# EAGLE board CommBeaconv1_18_2_12 (EAGLE 5.10)
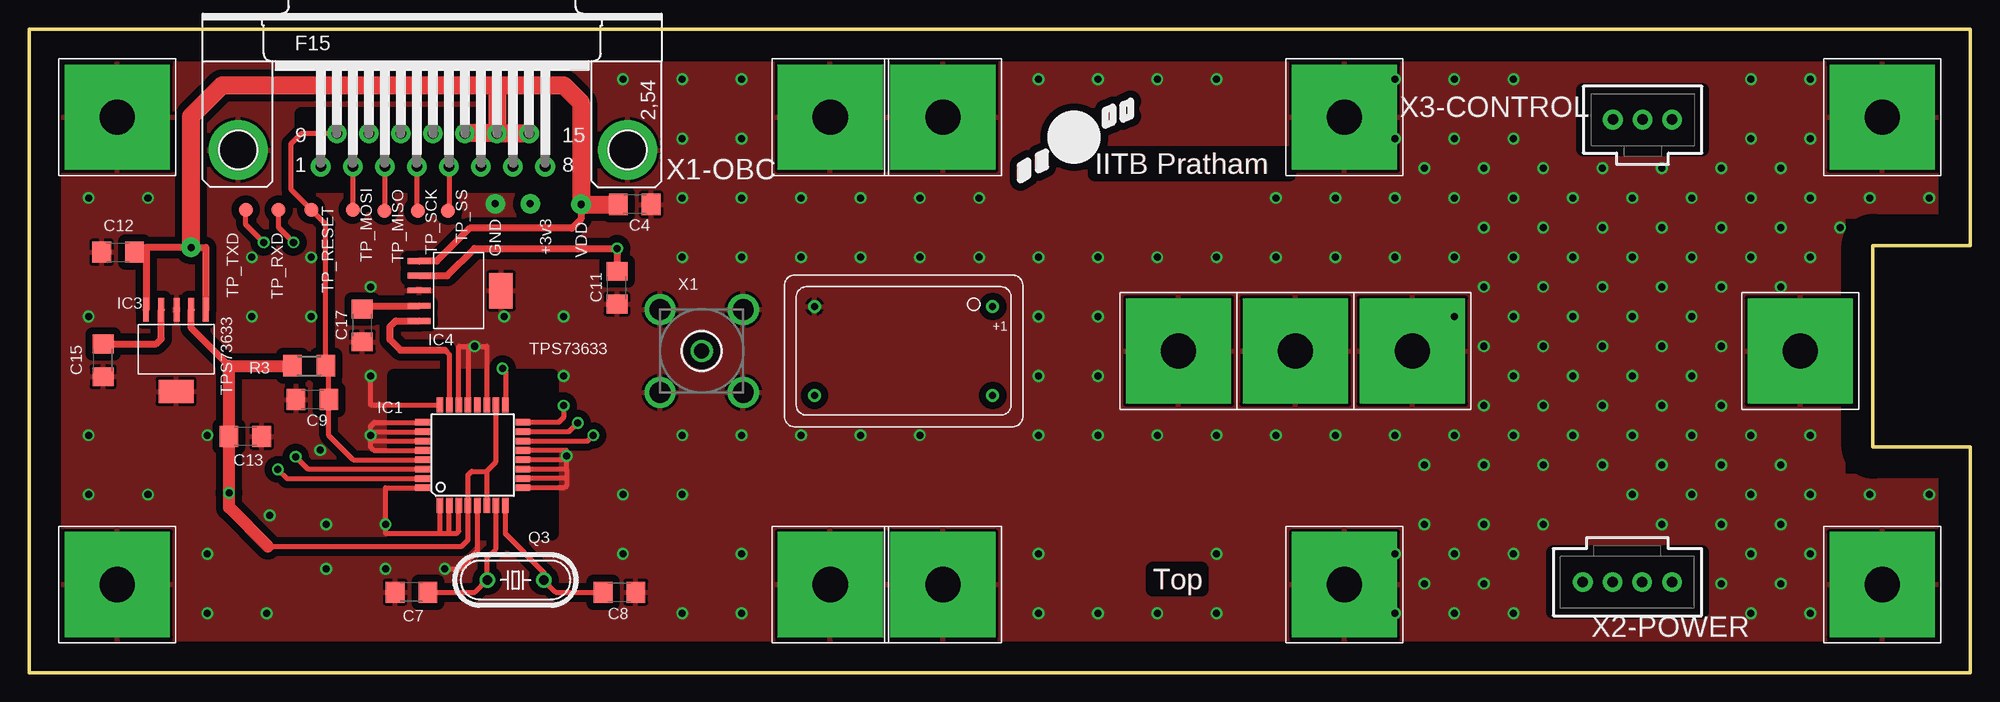
[diagram p0: board, top side]
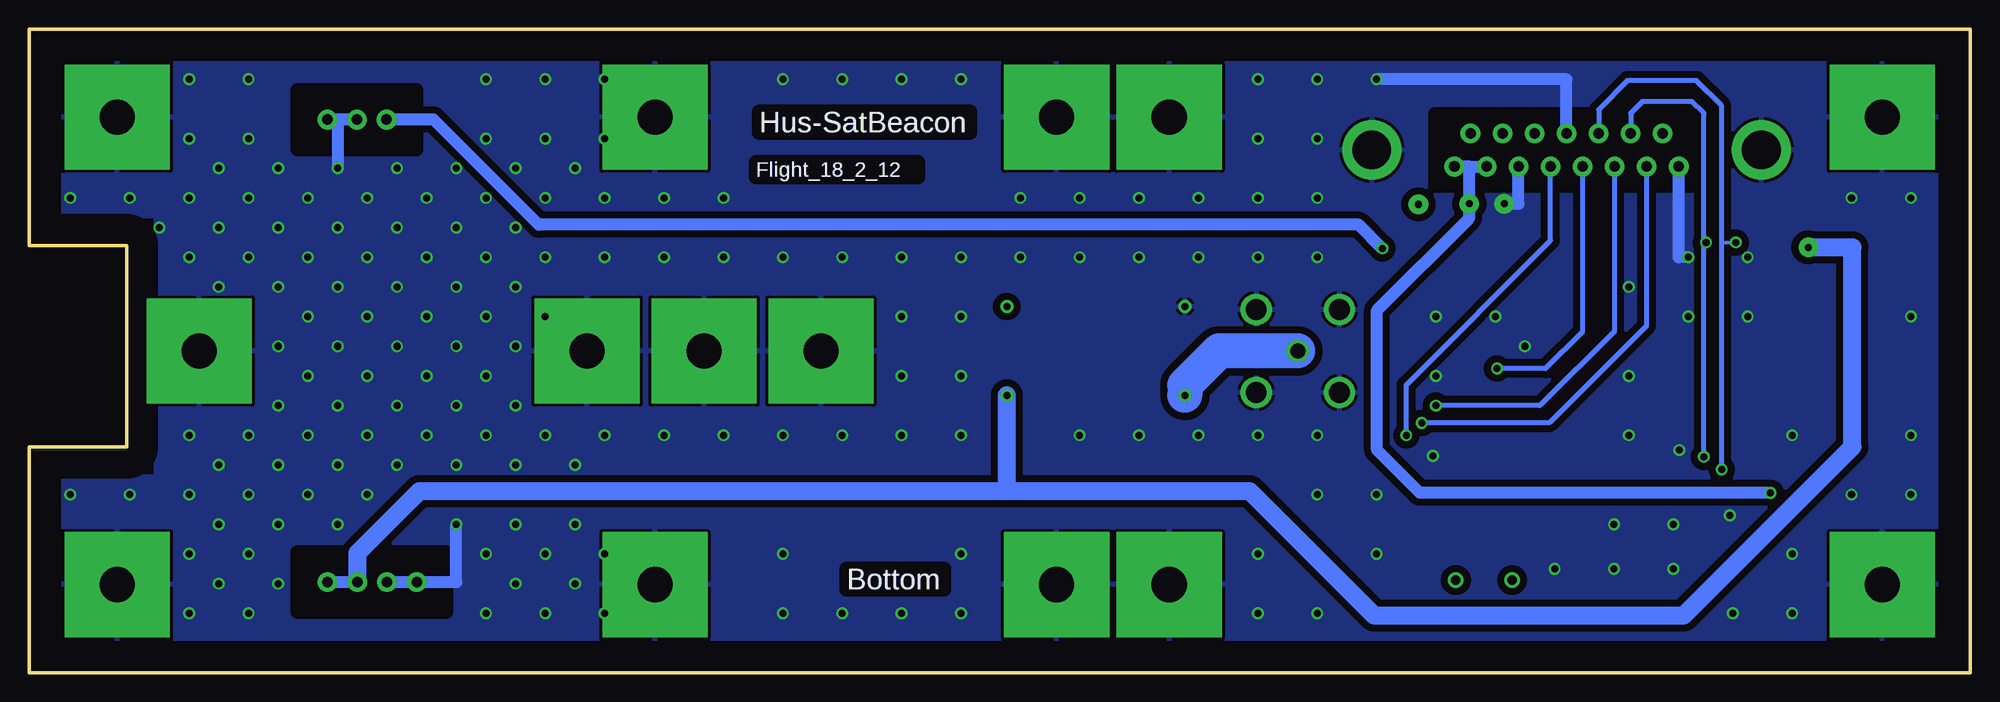
[diagram p1: board, bottom side, seen from below]

Size 166.08 x 55.08 mm. Coordinates in mm from the lower left corner, seen from the top.
Outline: 0,0 0,55.08 166.08,55.08 166.08,36.56 157.75,36.56 157.75,19.32 166.08,19.32 166.08,0 0,0
Copper layers (1*16): Top 0.07mm / dielectric 1.5mm / Bottom 0.07mm
Design rules "satellite": minimum track width 10mil, minimum drill 20mil, track to track 6mil, track to pad 6mil, pad to pad 6mil, via to via 6mil, smd to smd 6mil, copper to edge 100mil, drill to drill 8mil, minimum pad ring 10mil, minimum via ring 8mil, stop-mask expansion 4mil, vias tented up to drill 0mil, thermal gap 10mil
Net classes: 1 Power: width 0.254 mm, clearance 0.508 mm to class 0, clearance 0.508 mm
tRestrict: area 31.2,11.9 to 44.7,25.4

## Footprints (pad centres in the part's own frame; a part is rotated, then mirrored left to right if it is on the bottom)
C1206 = smd 1.6 x 1.8: 1 -1.4,0; 2 1.4,0
TQFP32-08 = smd 1.27 x 0.559: 1 -4.293,2.8; 2 -4.293,2; 3 -4.293,1.2; 4 -4.293,0.4; 5 -4.293,-0.4; 6 -4.293,-1.2; 7 -4.293,-2; 8 -4.293,-2.8; 17 4.293,-2.8; 18 4.293,-2; 19 4.293,-1.2; 20 4.293,-0.4; 21 4.293,0.4; 22 4.293,1.2; 23 4.293,2; 24 4.293,2.8 | smd 0.559 x 1.27: 9 -2.8,-4.293; 10 -2,-4.293; 11 -1.2,-4.293; 12 -0.4,-4.293; 13 0.4,-4.293; 14 1.2,-4.293; 15 2,-4.293; 16 2.8,-4.293; 25 2.8,4.293; 26 2,4.293; 27 1.2,4.293; 28 0.4,4.293; 29 -0.4,4.293; 30 -1.2,4.293; 31 -2,4.293; 32 -2.8,4.293
TXCO = drill 0.6 round: 1 -7.62,-3.81; 7 7.62,-3.81; 8 7.62,3.81; 14 -7.62,3.81
SOT-223-5 = smd 0.5 x 2: 1 -2.54,-2.75; 2 -1.29,-2.75; 3 -0.04,-2.75; 4 1.29,-2.75; 5 2.58,-2.75 | smd 3 x 2: 6 0,4.25
HC49/S = drill 0.813 round: 1 -2.413,0; 2 2.413,0
R1206 = smd 1.6 x 1.803: 1 -1.422,0; 2 1.422,0
TP12R = smd 1.2 x 1.2: TP 0,0
MOUNT_10MM = drill 3 pad 9 square: P$1 0,0
SMA-V = drill 1.27 round: 1 0,0 | drill 1.778 round: 2 -3.556,3.556; 3 3.556,3.556; 4 3.556,-3.556; 5 -3.556,-3.556
F15HP = drill 0.9 pad 1.676 round: 1 -9.601,-1.422; 2 -6.858,-1.422; 3 -4.115,-1.422; 4 -1.372,-1.422; 5 1.372,-1.422; 6 4.115,-1.422; 7 6.858,-1.422; 8 9.601,-1.422; 9 -8.23,1.422; 10 -5.486,1.422; 11 -2.743,1.422; 12 0,1.422; 13 2.743,1.422; 14 5.486,1.422; 15 8.23,1.422 | drill 3.302 pad 5.08 round: G1 16.662,0; G2 -16.662,0
70543-4 = drill 0.9 pad 1.676 round: 1 -3.81,0; 2 -1.27,0; 3 1.27,0; 4 3.81,0
70543-3 = drill 0.9 pad 1.676 round: 1 -2.54,0; 2 0,0; 3 2.54,0

## Placement (x,y rotation side)
C4  0.1uF  [C1206]  51.82,40.09 180 top
C7  22pF  [C1206]  32.72,6.89 180 top
C8  22pF  [C1206]  50.5,6.89 0 top
C9  0.1uF  [C1206]  24.23,23.37 180 top
C11  0.1uF  [C1206]  50.29,32.95 90 top
C12  0.1uF  [C1206]  7.61,35.99 0 top
C13  2.2uF  [C1206]  18.49,20.22 180 top
C15  0.1uF  [C1206]  6.32,26.73 90 top
C17  0.1uF  [C1206]  28.5,29.72 90 top
IC1  MEGA8-AI  [TQFP32-08]  37.95,18.62 90 top
IC2  145MHz CRYSTAL  [TXCO]  74.82,27.54 180 top
IC3  TPS73633  [SOT-223-5]  12.57,28.32 180 top
IC4  TPS73633  [SOT-223-5]  36.11,32.69 270 top
Q3  8MHz  [HC49/S]  41.61,7.93 180 top
R3  10K  [R1206]  23.95,26.27 180 top
TP_MISO  TPSQTP12R  [TP12R]  30.38,39.54 270 top
TP_MOSI  TPSQTP12R  [TP12R]  27.69,39.62 270 top
TP_RESET  TPSQTP12R  [TP12R]  24.13,39.62 0 top
TP_RXD  TPSQTP12R  [TP12R]  21.34,39.62 270 top
TP_SCK  TPSQTP12R  [TP12R]  33.24,39.54 270 top
TP_SS  TPSQTP12R  [TP12R]  35.84,39.54 270 top
TP_TXD  TPSQTP12R  [TP12R]  18.54,39.62 0 top
U$1  MOUNT_SQ  [MOUNT_10MM]  7.54,47.54 0 top
U$2  MOUNT_SQ  [MOUNT_10MM]  78.17,7.54 0 top
U$3  MOUNT_SQ  [MOUNT_10MM]  68.54,47.54 0 top
U$4  MOUNT_SQ  [MOUNT_10MM]  78.17,47.54 0 top
U$5  MOUNT_SQ  [MOUNT_10MM]  108.34,27.54 0 top
U$6  MOUNT_SQ  [MOUNT_10MM]  151.54,27.54 0 top
U$7  MOUNT_SQ  [MOUNT_10MM]  98.34,27.54 0 top
U$9  MOUNT_SQ  [MOUNT_10MM]  158.54,47.54 0 top
U$10  MOUNT_SQ  [MOUNT_10MM]  7.54,7.54 0 top
U$11  MOUNT_SQ  [MOUNT_10MM]  158.54,7.54 0 top
U$12  MOUNT_SQ  [MOUNT_10MM]  68.54,7.54 0 top
U$52.1  MOUNT_SQ  [MOUNT_10MM]  112.54,47.54 0 top
U$52.2  MOUNT_SQ  [MOUNT_10MM]  112.54,7.54 0 top
U$52.5  MOUNT_SQ  [MOUNT_10MM]  118.34,27.54 0 top
X1  CON_COAX  [SMA-V]  57.54,27.54 0 top
X1-OBC  OBC  [F15HP]  34.54,44.74 0 top
X2-POWER  CON-4  [70543-4]  136.74,7.74 180 top
X3-CONTROL  CON-3  [70543-3]  138.04,47.34 0 top

## Library data of the parts
C4 C7-C9 C11-C13 C15 C17 R3 = rcl
IC1 = atmel
IC2-IC4 U$1-U$7 U$9-U$12 U$52.1 U$52.2 U$52.5 X1 X1-OBC X2-POWER X3-CONTROL = satellite
Q3 = crystal
TP_MISO TP_MOSI TP_RESET TP_RXD TP_SCK TP_SS TP_TXD = testpad

## Nets
+3V3 [Power]: C13.2 IC1.4 IC1.6 IC1.18 IC3.2 R3.2 X1-OBC.7 X1-OBC.8
GND [Power]: C4.1 C7.2 C8.2 C9.2 C11.1 C12.1 C13.1 C15.1 C17.1 IC1.1 IC1.2 IC1.3 IC1.5 IC1.9 IC1.10 IC1.11 IC1.12 IC1.13 IC1.19 IC1.21 IC1.22 IC1.24 IC1.25 IC1.26 IC1.27 IC1.28 IC1.32 IC2.7 IC3.3 IC3.6 IC4.3 IC4.6 U$1.P$1 U$2.P$1 U$3.P$1 U$4.P$1 U$5.P$1 U$6.P$1 U$7.P$1 U$9.P$1 U$10.P$1 U$11.P$1 U$12.P$1 U$52.1.P$1 U$52.2.P$1 U$52.5.P$1 X1-OBC.1 X1-OBC.6 X1-OBC.12 X1-OBC.G1 X1-OBC.G2 X1.2 X1.3 X1.4 X1.5 X2-POWER.3 X2-POWER.4 X3-CONTROL.2 X3-CONTROL.3
MISO: IC1.16 TP_MISO.TP X1-OBC.3
MOSI: IC1.15 TP_MOSI.TP X1-OBC.2
N$3: IC1.23 IC4.5
N$6: C15.2 IC3.4
N$7: IC2.8 X1.1
N$23: C7.1 IC1.7 Q3.2
N$24: C8.1 IC1.8 Q3.1
N$38: C17.2 IC4.4
RESET: C9.1 IC1.29 R3.1 TP_RESET.TP X1-OBC.9
RXD: IC1.30 TP_RXD.TP X1-OBC.10
SCK: IC1.17 TP_SCK.TP X1-OBC.4
SS: IC1.14 TP_SS.TP X1-OBC.5
TXD: IC1.31 TP_TXD.TP X1-OBC.11
VAPC: C11.2 IC4.2 X3-CONTROL.1
VDD [Power]: C4.2 C12.2 IC2.14 IC3.1 IC3.5 IC4.1 X1-OBC.13 X1-OBC.14 X1-OBC.15 X2-POWER.1 X2-POWER.2

## Tracks (layer width: path | path; a pad name or v marks a point on that pad's centre or on a via)
+3V3  (via drill 0.6 pad 1.02, 0.6 pad 1.68)
  Top 0.406: 20.42,10.8 36.98,10.8 37.55,11.37 IC1.4 | IC1.4 37.55,16.93 37.86,17.24 39.15,17.24 | IC1.4 37.57,14.31 | 39.15,17.24 IC1.6 | IC1.18 39.95,18.04 39.15,17.24
  Top 0.61: IC3.2 13.86,29.5 17.09,26.27
  Top 1.016: 20.42,10.8 17.09,14.13 v17.09,15.4 C13.2 17.09,26.27 R3.2
  Bottom 1.016: v17.09,15.4 47.11,15.4 50.77,19.06 50.77,31.02 42.87,38.92 v42.87,40.13 42.87,43.32 | 42.87,43.32 X1-OBC.7 | 42.87,43.32 X1-OBC.8
GND  (via drill 0.6, 0.6 pad 1.68)
  Top 0.406: IC1.5 38.35,10.41 36.83,8.89 v35.56,8.89 | IC1.32 30.48,15.82 v30.48,12.7 30.48,11.94 35.15,11.94 | IC1.3 36.75,12.11 36.58,11.94 35.95,11.94 | IC1.13 45.97,19.02 v45.97,18.54 | IC1.24 29.21,22.92 v29.21,25.4 | IC1.22 36.75,27.94 v38.1,27.94 | IC1.19 39.15,27.94 v38.1,27.94 | IC1.21 37.55,27.94 v38.1,27.94 | IC1.28 29.49,19.02 29.21,19.3 29.21,19.82 | IC1.26 29.21,20.62 v29.21,20.32 | 29.21,19.82 IC1.27 | 29.21,19.82 v29.21,20.32 | IC1.25 29.55,21.42 29.21,21.08 v29.21,20.32 | IC1.12 45.97,18.22 v45.97,18.54 | IC1.11 45.97,17.42 | 45.97,17.42 v45.97,18.54 | 45.97,16.62 IC1.10 | 45.97,17.42 45.97,16.62 | IC1.9 45.8,15.82 45.97,16 45.97,16.62 | 35.15,11.94 IC1.1 | 35.95,11.94 IC1.2 | 35.15,11.94 35.95,11.94
  Bottom 1.016: X3-CONTROL.2 X3-CONTROL.3 139.7,47.34 v139.7,43.18 | X2-POWER.3 X2-POWER.4 129.54,7.74 v129.54,12.7 | X1-OBC.6 38.66,40.13 v39.88,40.13 | X1-OBC.1 24.94,35.56 v24.13,35.56 | X1-OBC.G1 49.93,46.01 | X1-OBC.12 34.54,50.8 v50.8,50.8
  other vias: 5.08,15.24 10.16,15.24 15.24,10.16 15.24,5.08 20.32,5.08 55.88,5.08 60.96,5.08 60.96,10.16 86.36,10.16 86.36,5.08 91.44,5.08 96.52,5.08 101.6,5.08 116.84,5.08 121.92,5.08 127,5.08 127,10.16 127,20.32 132.08,20.32 121.92,20.32 116.84,20.32 111.76,20.32 106.68,20.32 101.6,20.32 96.52,20.32 91.44,20.32 137.16,20.32 142.24,20.32 147.32,20.32 152.4,20.32 152.4,15.24 157.48,15.24 162.56,15.24 147.32,15.24 142.24,15.24 137.16,15.24 147.32,10.16 147.32,5.08 152.4,5.08 152.4,10.16 144.78,17.78 144.78,22.86 142.24,25.4 142.24,30.48 139.7,22.86 137.16,25.4 134.62,22.86 132.08,25.4 129.54,22.86 127,25.4 124.46,22.86 144.78,27.94 149.86,17.78 149.86,12.7 144.78,12.7 139.7,17.78 134.62,17.78 129.54,17.78 124.46,17.78 119.38,17.78 119.38,12.7 116.84,10.16 124.46,12.7 121.92,10.16 139.7,12.7 144.78,7.62 149.86,7.62 124.46,7.62 119.38,7.62 132.08,35.56 137.16,35.56 142.24,35.56 147.32,35.56 149.86,38.1 147.32,40.64 144.78,38.1 142.24,40.64 139.7,38.1 137.16,40.64 134.62,38.1 132.08,40.64 129.54,38.1 127,35.56 144.78,43.18 149.86,43.18 152.4,40.64 152.4,35.56 149.86,33.02 154.94,38.1 157.48,40.64 162.56,40.64 121.92,35.56 116.84,35.56 121.92,40.64 116.84,40.64 119.38,43.18 116.84,45.72 121.92,45.72 127,45.72 124.46,43.18 147.32,45.72 134.62,43.18 152.4,45.72 152.4,50.8 147.32,50.8 127,50.8 121.92,50.8 116.84,50.8 124.46,27.94 129.54,27.94 134.62,27.94 139.7,27.94 144.78,33.02 139.7,33.02 137.16,30.48 134.62,33.02 132.08,30.48 129.54,33.02 127,30.48 124.46,33.02 121.92,30.48 101.6,10.16 86.36,20.32 86.36,25.4 91.44,25.4 91.44,30.48 86.36,30.48 86.36,35.56 91.44,35.56 96.52,35.56 101.6,35.56 106.68,35.56 111.76,35.56 111.76,40.64 106.68,40.64 101.6,50.8 96.52,50.8 91.44,50.8 86.36,50.8 60.96,50.8 5.08,20.32 5.08,30.48 5.08,40.64 10.16,40.64 60.96,45.72 60.96,40.64 66.04,40.64 71.12,40.64 76.2,40.64 81.28,40.64 81.28,35.56 76.2,35.56 71.12,35.56 66.04,35.56 60.96,35.56 55.88,35.56 55.88,40.64 55.88,45.72 55.88,50.8 55.88,15.24 50.8,15.24 50.8,10.16 25.4,8.89 30.48,8.89 25.4,12.7 20.57,13.46 40.64,30.48 45.72,25.4 45.72,30.48 29.21,33.02 24.13,30.48 19.05,30.48 19.05,35.56 15.24,20.32 24.89,19.05 127,40.64 129.54,43.18 124.46,38.1 76.2,20.32 71.12,20.32 66.04,20.32 55.88,20.32 60.96,20.32
  pour Top (isolate 0.61): 2.54,2.54 163.54,2.54 163.54,16.78 155.21,16.78 155.21,39.1 163.54,39.1 163.54,52.54 2.54,52.54
  pour Bottom (isolate 0.61): 163.54,2.54 163.54,16.78 155.21,16.78 155.21,39.1 163.54,39.1 163.54,52.54 2.54,52.54 2.54,2.54
MISO  (via drill 0.6)
  Top 0.406: v45.72,22.86 45.72,21.84 45.3,21.42 IC1.16 | X1-OBC.3 30.43,39.59 TP_MISO.TP
  Bottom 0.406: X1-OBC.3 30.43,29.27 36.83,22.86 v45.72,22.86
MOSI  (via drill 0.6 pad 0.41)
  Top 0.406: IC1.15 46.17,20.62 v46.93,21.39 | X1-OBC.2 TP_MOSI.TP
  Bottom 0.406: v46.93,21.39 36.02,21.39 27.68,29.73 X1-OBC.2
N$1
  Top 0.61: 86.34,44.3 86.97,44.58 86.97,43.31 86.34,43.03 86.34,44.3
N$2
  Top 0.61: 84.81,43.43 85.45,43.81 85.45,42.55 84.81,42.16 84.81,43.43
N$3
  Top 0.406: 35.59,27.61 35.95,27.25 IC1.23
  Top 0.61: 35.59,27.61 31.76,27.61 30.86,28.52 30.86,29.62 31.35,30.11 IC4.5
N$4
  Top 0.61: 92.08,48.13 92.71,48.41 92.71,47.14 92.08,46.86 92.08,48.13
N$5
  Top 0.61: 94.23,48.92 93.6,48.64 93.6,47.37 94.23,47.65
N$6
  Top 0.406: 11.3,31.05 IC3.4
  Top 0.61: C15.2 10.86,28.13 11.3,28.57 11.3,31.05
N$7
  Bottom 3: X1.1 64.27,27.54 67.2,24.61 IC2.8
N$23
  Top 0.406: IC1.7 39.95,10.62 39.19,9.86 Q3.2 38.15,6.89 C7.1
N$24
  Top 0.406: IC1.8 40.75,11.87 44.02,8.6 Q3.1 45.06,6.89 C8.1
N$38
  Top 0.61: IC4.4 28.5,31.4 C17.2
RESET
  Top 0.406: IC1.29 27.73,18.22 25.63,20.32 C9.1 25.63,26.27 R3.1 25.37,38.38 TP_RESET.TP 22.4,41.35 22.4,45.26 23.3,46.16 X1-OBC.9
RXD  (via drill 0.6, 0.6 pad 0.41)
  Top 0.406: IC1.30 33.62,17.45 23.82,17.45 v22.8,18.48 | TP_RXD.TP 21.34,38.1 v22.61,36.83
  Bottom 0.305: 22.8,36.83 v22.61,36.83
  Bottom 0.406: v22.8,18.48 22.8,36.83 22.8,47.88 23.81,48.89 28.07,48.89 29.05,47.91 X1-OBC.10
SCK  (via drill 0.6)
  Top 0.406: IC1.17 40.75,25.78 v40.49,26.04 | X1-OBC.4 33.17,39.61 TP_SCK.TP
  Bottom 0.406: v40.49,26.04 36.35,26.04 33.17,29.22 X1-OBC.4
SS  (via drill 0.6)
  Top 0.406: IC1.14 47.76,19.82 v48.26,20.32 | TP_SS.TP 35.91,39.61 X1-OBC.5
  Bottom 0.406: v48.26,20.32 48.26,24.64 35.91,36.99 X1-OBC.5
TXD  (via drill 0.6, 0.6 pad 0.41)
  Top 0.406: IC1.31 33.65,16.62 22.05,16.62 v21.27,17.4 | TP_TXD.TP 18.54,38.35 v20.07,36.83
  Bottom 0.305: 21.27,36.83 v20.07,36.83
  Bottom 0.406: v21.27,17.4 21.27,36.83 21.27,48.51 23.43,50.67 29.34,50.67 31.8,48.21 X1-OBC.11
VAPC  (via drill 0.6 pad 1.02)
  Top 0.61: IC4.2 35.76,33.98 38.1,36.32 v50.29,36.32 C11.2
  Bottom 1.016: v50.29,36.32 52.32,38.35 122.49,38.35 131.48,47.34 X3-CONTROL.1
VDD  (via drill 0.6 pad 1.68)
  Top 0.406: IC3.1 15.13,31.09
  Top 0.61: IC4.1 34.87,35.23 37.69,38.05 46.44,38.05 47.22,38.84 v47.22,40.09 | 9.99,35.99 IC3.5 | 9.99,35.99 C12.2 | 9.99,35.99 9.99,36.4 v13.85,36.4 15.11,36.4 IC3.1
  Top 1.524: C4.2 v47.22,40.09 47.22,48.79 45.74,50.27 40.03,50.27 | v13.85,36.4 13.85,47.62 16.51,50.27 40.03,50.27 | 40.03,50.27 X1-OBC.14 | X1-OBC.14 X1-OBC.15 | X1-OBC.14 X1-OBC.13
  Bottom 1.016: X2-POWER.2 X2-POWER.1
  Bottom 1.524: v13.85,36.4 10.08,36.4 10.08,19.34 24.54,4.88 51,4.88 61.65,15.52 82.44,15.52 | X2-POWER.2 138.01,10.23 132.72,15.52 82.44,15.52 | 82.44,15.52 IC2.14
(copper drawn outside any net)
  shapes: Top circle x1

## Text on the board
Top: IITB Pratham | Top
Bottom: Hus-SatBeacon | Flight_18_2_12 | Bottom
tPlace: IITB Pratham | Top
bPlace: Hus-SatBeacon | Flight_18_2_12 | Bottom
tNames: GND | +3v3 | VDD